# EAGLE board Perspex (EAGLE 6.6.0)

Size 469.9 x 149.22 mm. Coordinates in mm from the lower left corner, seen from the top.
Outline: 0,1.59 0,144.46 4.76,149.22 465.14,149.22 469.9,144.46 469.9,114.3 469.9,3.17 469.9,1.59 468.31,0 88.9,0 85.72,0 1.59,0 0,1.59
Copper layers (1+16): Top 0.035mm / dielectric 1.5mm / Bottom 0.035mm
Design rules "15mils *": minimum track width 15mil, minimum drill 24mil, track to track 15mil, track to pad 10mil, pad to pad 10mil, via to via 10mil, smd to smd 10mil, copper to edge 25mil, drill to drill 10mil, minimum pad ring 10mil, minimum via ring 8mil, stop-mask expansion 0mil, vias tented up to drill 0mil, thermal gap 10mil
Net classes: 1 supply: width 0.762 mm
Holes 6.35 mm at 130.18,3.17 412.75,3.17

## Footprints (pad centres in the part's own frame; a part is rotated, then mirrored left to right if it is on the bottom)
SPADELUG = drill 3.175 pad 7.62: 1 0,0
BULB = drill 1.422 octagon: A 0,0; B 0,2.54
STRAIN-RELIEF = hole 3.175: 7.62,56.515; 7.62,5.715
3,6 = hole 3.6: 0,0

## Placement (x,y rotation side)
+15VA  LUG  [SPADELUG]  361.95,69.85 0 top
+15VBB  LUG  [SPADELUG]  361.95,12.7 0 top
AC0  [BULB]  174.62,33.34 0 top
AC1  [BULB]  188.91,33.34 0 top
AC2  [BULB]  203.2,33.34 0 top
AC3  [BULB]  217.49,33.34 0 top
AC4  [BULB]  231.78,33.34 0 top
AC5  [BULB]  246.06,33.34 0 top
AC6  [BULB]  260.35,33.34 0 top
AC7  [BULB]  274.64,33.34 0 top
AC8  [BULB]  288.93,33.34 0 top
AC9  [BULB]  303.21,33.34 0 top
AC10  [BULB]  317.5,33.34 0 top
AC11  [BULB]  331.79,33.34 0 top
AND  [BULB]  388.94,100.01 0 top
BREAK  [BULB]  417.51,44.45 0 top
CURRENTADDRESS  [BULB]  417.51,55.56 0 top
DCA  [BULB]  388.94,66.67 0 top
DEFER  [BULB]  417.51,77.79 0 top
DF0  [BULB]  88.9,100.01 0 top
DF1  [BULB]  103.19,100.01 0 top
DF2  [BULB]  117.47,100.01 0 top
EXECUTE  [BULB]  417.51,88.9 0 top
FETCH  [BULB]  417.51,100.01 0 top
GNDA  LUG  [SPADELUG]  361.95,93.66 0 top
GNDB  LUG  [SPADELUG]  361.95,28.57 0 top
IF0  [BULB]  131.76,100.01 0 top
IF1  [BULB]  146.05,100.01 0 top
IF2  [BULB]  160.34,100.01 0 top
ION  [BULB]  446.09,100.01 0 top
IOT  [BULB]  388.94,33.34 0 top
ISZ  [BULB]  388.94,77.79 0 top
JMP  [BULB]  388.94,44.45 0 top
JMS  [BULB]  388.94,55.56 0 top
LINK  [BULB]  160.34,33.34 0 top
MA0  [BULB]  174.62,77.79 0 top
MA1  [BULB]  188.91,77.79 0 top
MA2  [BULB]  203.2,77.79 0 top
MA3  [BULB]  217.49,77.79 0 top
MA4  [BULB]  231.78,77.79 0 top
MA5  [BULB]  246.06,77.79 0 top
MA6  [BULB]  260.35,77.79 0 top
MA7  [BULB]  274.64,77.79 0 top
MA8  [BULB]  288.93,77.79 0 top
MA9  [BULB]  303.21,77.79 0 top
MA10  [BULB]  317.5,77.79 0 top
MA11  [BULB]  331.79,77.79 0 top
MB0  [BULB]  174.62,55.56 0 top
MB1  [BULB]  188.91,55.56 0 top
MB2  [BULB]  203.2,55.56 0 top
MB3  [BULB]  217.49,55.56 0 top
MB4  [BULB]  231.78,55.56 0 top
MB5  [BULB]  246.06,55.56 0 top
MB6  [BULB]  260.35,55.56 0 top
MB7  [BULB]  274.64,55.56 0 top
MB8  [BULB]  288.93,55.56 0 top
MB9  [BULB]  303.21,55.56 0 top
MB10  [BULB]  317.5,55.56 0 top
MB11  [BULB]  331.79,55.56 0 top
MQ0  [BULB]  174.62,11.11 0 top
MQ1  [BULB]  188.91,11.11 0 top
MQ2  [BULB]  203.2,11.11 0 top
MQ3  [BULB]  217.49,11.11 0 top
MQ4  [BULB]  231.78,11.11 0 top
MQ5  [BULB]  246.06,11.11 0 top
MQ6  [BULB]  260.35,11.11 0 top
MQ7  [BULB]  274.64,11.11 0 top
MQ8  [BULB]  288.93,11.11 0 top
MQ9  [BULB]  303.21,11.11 0 top
MQ10  [BULB]  317.5,11.11 0 top
MQ11  [BULB]  331.79,11.11 0 top
OPR  [BULB]  388.94,22.23 0 top
PAUSE  [BULB]  446.09,88.9 0 top
PC0  [BULB]  174.62,100.01 0 top
PC1  [BULB]  188.91,100.01 0 top
PC2  [BULB]  203.2,100.01 0 top
PC3  [BULB]  217.49,100.01 0 top
PC4  [BULB]  231.78,100.01 0 top
PC5  [BULB]  246.06,100.01 0 top
PC6  [BULB]  260.35,100.01 0 top
PC7  [BULB]  274.64,100.01 0 top
PC8  [BULB]  288.93,100.01 0 top
PC9  [BULB]  303.21,100.01 0 top
PC10  [BULB]  317.5,100.01 0 top
PC11  [BULB]  331.79,100.01 0 top
RUN  [BULB]  446.09,77.79 0 top
SC0  [BULB]  88.9,11.11 0 top
SC1  [BULB]  103.19,11.11 0 top
SC2  [BULB]  117.47,11.11 0 top
SC3  [BULB]  131.76,11.11 0 top
SC4  [BULB]  146.05,11.11 0 top
TAD  [BULB]  388.94,88.9 0 top
U$1  [STRAIN-RELIEF]  157.16,127 90 top
U$2  [STRAIN-RELIEF]  242.89,127 90 top
U$3  [STRAIN-RELIEF]  328.61,127 90 top
U$4  [STRAIN-RELIEF]  442.91,127 90 top
U$5  [3,6]  450.85,117.47 0 top
U$6  [3,6]  450.85,39.69 0 top
U$7  [3,6]  266.7,39.69 0 top
U$8  [3,6]  93.66,39.69 0 top
U$9  [3,6]  93.66,117.47 0 top
U$11  [3,6]  238.12,117.47 0 top
WORDCOUNT  [BULB]  417.51,66.67 0 top

## Library data of the parts
+15VA +15VBB AC0 AC1-AC11 AND BREAK CURRENTADDRESS DCA DEFER DF0 DF1 DF2 EXECUTE FETCH GNDA GNDB IF0 IF1 IF2 ION IOT ISZ JMP JMS LINK MA0 MA1-MA11 MB0 MB1-MB11 MQ0 MQ1-MQ11 OPR PAUSE PC0 PC1-PC11 RUN SC0 SC1-SC4 TAD U$1-U$4 WORDCOUNT = dec-con
U$5-U$9 U$11 = holes

## Nets
N$2: DF1.B
N$3: DF2.B
N$4: IF0.B
N$5: IF1.B
N$6: IF2.B
N$7: PC0.B
N$8: PC1.B
N$9: PC2.B
N$10: PC3.B
N$11: PC4.B
N$12: PC5.B
N$13: PC6.B
N$14: PC7.B
N$15: PC8.B
N$16: PC9.B
N$17: PC10.B
N$18: PC11.B
N$19: MA0.B
N$20: MA1.B
N$21: MA2.B
N$22: MA3.B
N$24: MA5.B
N$25: MA6.B
N$26: MA7.B
N$27: MA8.B
N$28: MA9.B
N$29: MA10.B
N$30: MA11.B
N$31: MB0.B
N$32: MB1.B
N$33: MB2.B
N$34: MB3.B
N$35: MB4.B
N$36: MB5.B
N$37: MB6.B
N$38: MB7.B
N$39: MB8.B
N$40: MB9.B
N$41: MB10.B
N$42: MB11.B
N$43: AC0.B
N$44: AC1.B
N$45: AC2.B
N$46: AC3.B
N$47: AC4.B
N$48: AC5.B
N$49: AC6.B
N$50: AC7.B
N$51: AC8.B
N$52: AC9.B
N$53: AC10.B
N$54: AC11.B
N$55: MQ0.B
N$56: MQ1.B
N$57: MQ2.B
N$58: MQ3.B
N$59: MQ4.B
N$60: MQ5.B
N$61: MQ6.B
N$62: MQ7.B
N$63: MQ8.B
N$64: MQ9.B
N$65: MQ10.B
N$66: MQ11.B
N$67: SC0.B
N$68: SC1.B
N$69: SC2.B
N$71: SC4.B
N$72: LINK.B
N$73: ION.B
N$74: PAUSE.B
N$75: RUN.B
N$76: FETCH.B
N$77: EXECUTE.B
N$78: DEFER.B
N$79: WORDCOUNT.B
N$80: CURRENTADDRESS.B
N$81: BREAK.B
N$82: AND.B
N$83: TAD.B
N$84: ISZ.B
N$85: DCA.B
N$86: JMS.B
N$87: JMP.B
N$88: IOT.B
N$89: OPR.B
S$1 [supply]: GNDB.1
S$4 [supply]: GNDA.1

## Text on the board
Dimension: 1/8" Thick Plastic Stock